# Altium PCB JacdacRgbLed1Ec30 77.PcbDoc
Units mm, origin at the board's own origin, x right, y up, seen from the top; angles counter-clockwise.
Board outline 25 x 28 mm, 2 copper layers (Top Layer, Bottom Layer), stack 1.525 mm thick; 31 components, 28 nets, 136 pads, 42 vias.
Unrouted connection lines stored in the file: 10.
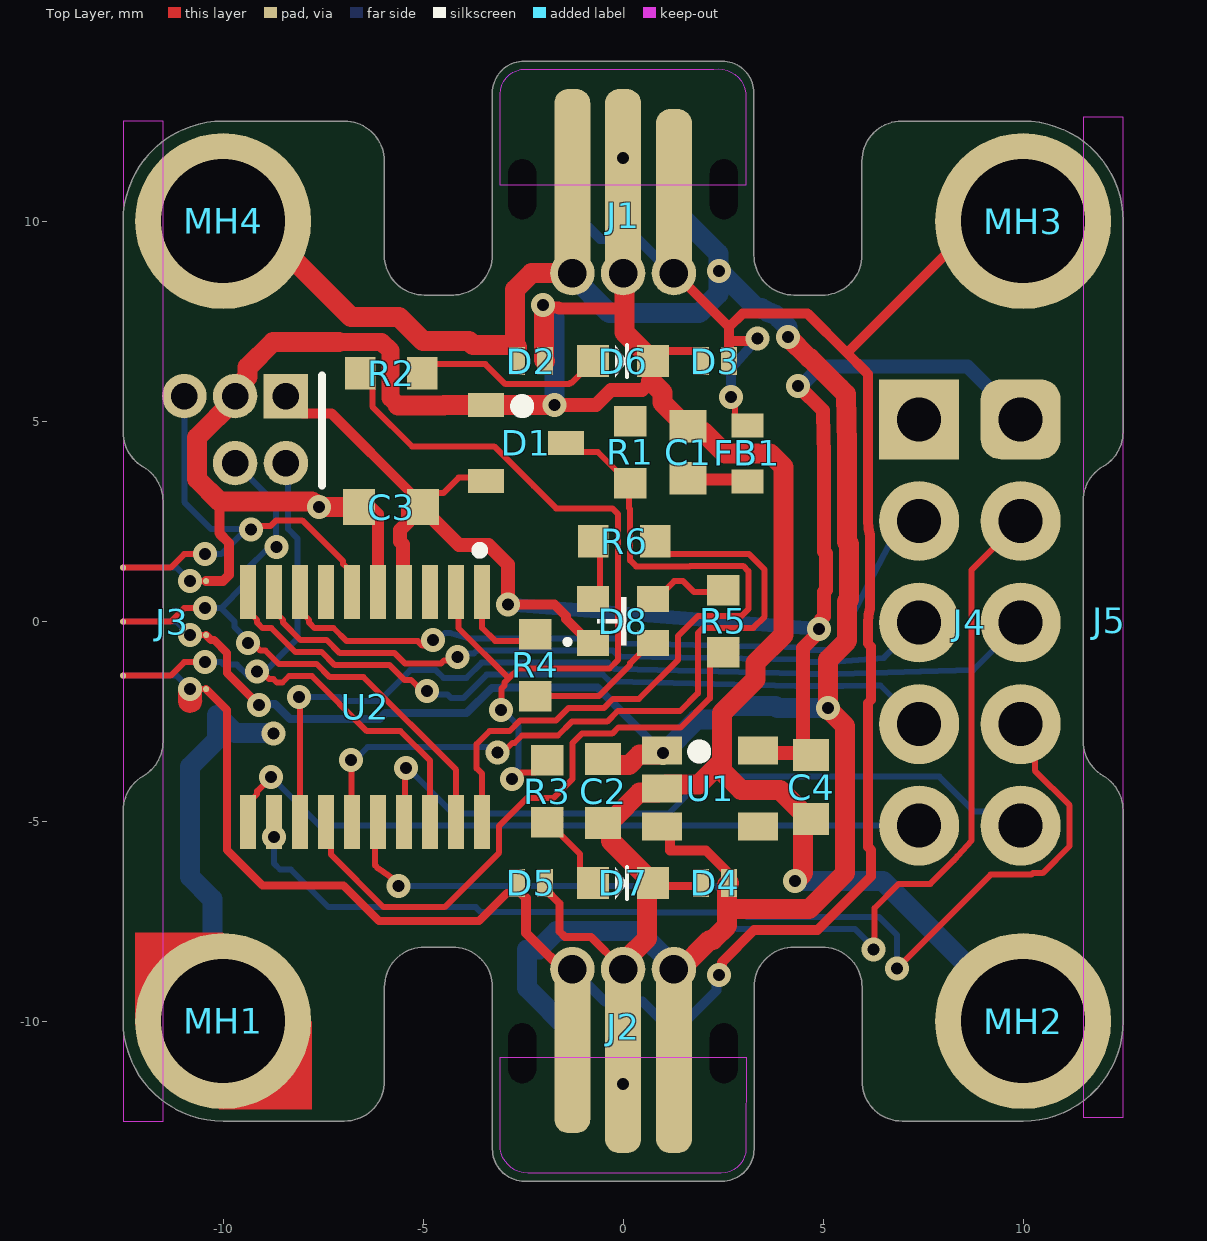
[diagram p0: Top Layer view]
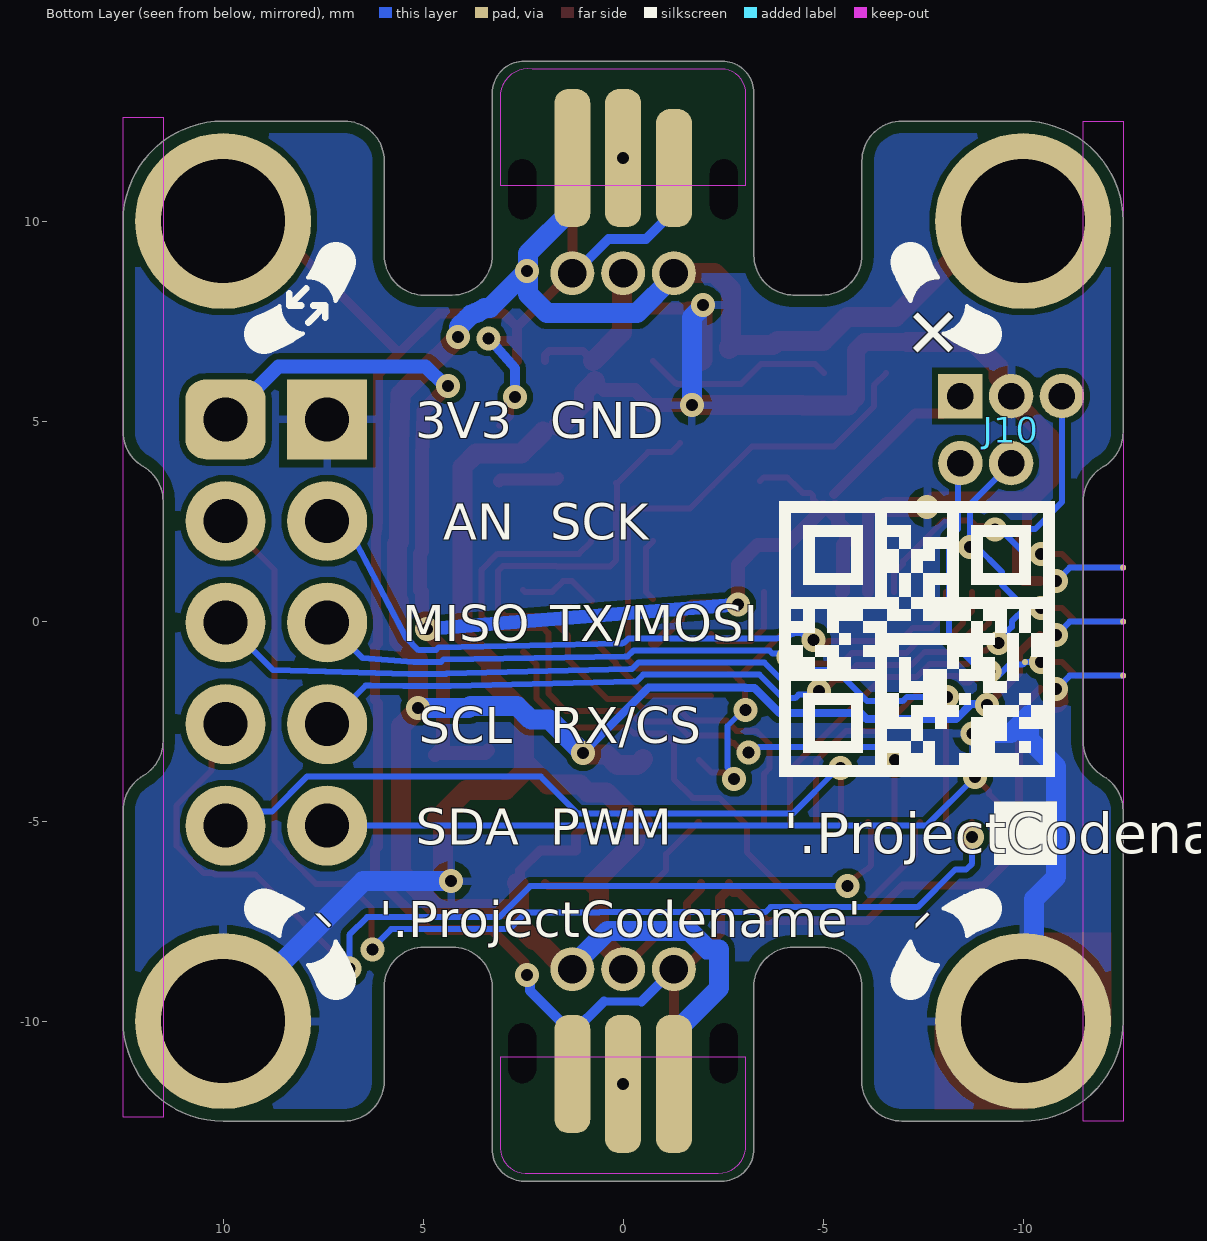
[diagram p1: Bottom Layer view, seen from below]

## Layer stack, top to bottom
Top Solder: solder mask 0.0102, Solder Resist, Dk 3.5
Top Layer: signal copper 0.0356
Dielectric 1: core 1.454, FR-4, Dk 4.2
Bottom Layer: signal copper 0.0356
Bottom Solder: solder mask 0.0102, Solder Resist, Dk 3.5

## Board outline
-12.5,-10 ccw(c-10,-10) -10,-12.5 -6.966,-12.5 ccw(c-6.966,-11.5) -5.966,-11.5 -5.966,-9.148 cw(c-4.966,-9.148) -4.966,-8.148 -4.266,-8.15 cw(c-4.266,-9.15) -3.266,-9.15 -3.266,-13.2 ccw(c-2.466,-13.2) -2.466,-14 2.474,-14 ccw(c2.474,-13.2) 3.274,-13.2 3.274,-9.148 cw(c4.273,-9.149) 4.274,-8.15 4.244,-8.15 4.974,-8.15 cw(c4.975,-9.149) 5.974,-9.148 5.974,-11.5 ccw(c6.974,-11.5) 6.974,-12.5 10,-12.5 ccw(c10,-10) 12.5,-10 12.5,-4.732 ccw(c11.5,-4.732) 12,-3.866 cw(c12.5,-3) 11.5,-3 11.5,3 cw(c12.5,3) 12,3.866 ccw(c11.5,4.732) 12.5,4.732 12.5,10 ccw(c10,10) 10,12.5 6.97,12.5 ccw(c6.97,11.5) 5.97,11.5 5.97,9.148 cw(c4.97,9.148) 4.97,8.148 4.27,8.15 cw(c4.27,9.15) 3.27,9.15 3.27,13.2 ccw(c2.47,13.2) 2.47,14 -2.47,14 ccw(c-2.47,13.2) -3.27,13.2 -3.27,9.148 cw(c-4.269,9.149) -4.27,8.15 -4.24,8.15 -4.97,8.15 cw(c-4.971,9.149) -5.97,9.148 -5.97,11.5 ccw(c-6.97,11.5) -6.97,12.5 -10,12.5 ccw(c-10,10) -12.5,10 -12.5,4.723 ccw(c-11.5,4.723) -12,3.857 cw(c-12.5,2.992) -11.5,2.992 -11.5,-3.008 cw(c-12.5,-3.008) -12,-3.874 ccw(c-11.5,-4.74) -12.5,-4.74

## Design rules (kind name [scope] priority, off if disabled: settings)
AssemblyTestPointUsage [All] p1: valid=2
BoardOutlineClearance [not (HasFootprint('MOUSEBITE_CONNECTOR_3X2') or HasFootprint('MOUSEBITE_NOCONNECTOR_3'))] p1: gap=0.3 ignorepadtopadclearanceinfootprint=FALSE except(0: Arc-SplitContinuation Track-SplitContinuation SMDPad-SplitContinuation THPad-SplitContinuation Via-SplitContinuation Fill-SplitContinuation Poly-SplitContinuation Text-OutlineEdge Text-CavityEdge Text-CutoutEdge Text-SplitBarrior Text-SplitContinuation; 0.15: Region-OutlineEdge Region-CavityEdge Region-CutoutEdge Region-SplitBarrior Region-SplitContinuation)
Clearance [not (IsPad and HasFootprint('MOUSEBITE_CONNECTOR_3X2'))] p1: gap=0.15 ignorepadtopadclearanceinfootprint=FALSE except(0.254: Arc-Hole Track-Hole SMDPad-Hole THPad-Hole Via-Hole Fill-Hole Poly-Hole Region-Hole Text-Hole)
ComponentClearance [All] p1: gap=0.01 collisioncheckmode=3 verticalgap=0.2 showdistances=FALSE
DiffPairsRouting [All] p1: maxlimit=2 minlimit=0.15 mostfreqgap=0.15 toplayer_minwidth=0.15 toplayer_maxwidth=2 toplayer_prefwidth=0.15 bottomlayer_minwidth=0.15 bottomlayer_maxwidth=2 bottomlayer_prefwidth=0.15 substack1={CB9D278B-8BF5-444A-AAF4-837A2A9DF42D} toplayer_{cb9d278b-8bf5-444a-aaf4-837a2a9df42d}_minwidth=0.381 toplayer_{cb9d278b-8bf5-444a-aaf4-837a2a9df42d}_maxwidth=0.381 toplayer_{cb9d278b-8bf5-444a-aaf4-837a2a9df42d}_prefwidth=0.381 bottomlayer_{cb9d278b-8bf5-444a-aaf4-837a2a9df42d}_minwidth=0.381 bottomlayer_{cb9d278b-8bf5-444a-aaf4-837a2a9df42d}_maxwidth=0.381 bottomlayer_{cb9d278b-8bf5-444a-aaf4-837a2a9df42d}_prefwidth=0.381 substack2={826B8647-A721-4255-895A-19F9591B9CD1} toplayer_{826b8647-a721-4255-895a-19f9591b9cd1}_minwidth=0.381 toplayer_{826b8647-a721-4255-895a-19f9591b9cd1}_maxwidth=0.381 toplayer_{826b8647-a721-4255-895a-19f9591b9cd1}_prefwidth=0.381 bottomlayer_{826b8647-a721-4255-895a-19f9591b9cd1}_minwidth=0.381 bottomlayer_{826b8647-a721-4255-895a-19f9591b9cd1}_maxwidth=0.381 bottomlayer_{826b8647-a721-4255-895a-19f9591b9cd1}_prefwidth=0.381 substack3={E64FCAF4-1BC8-437D-B1E0-0E5F2DC0F59E} toplayer_{e64fcaf4-1bc8-437d-b1e0-0e5f2dc0f59e}_minwidth=0.381 toplayer_{e64fcaf4-1bc8-437d-b1e0-0e5f2dc0f59e}_maxwidth=0.381 toplayer_{e64fcaf4-1bc8-437d-b1e0-0e5f2dc0f59e}_prefwidth=0.381 bottomlayer_{e64fcaf4-1bc8-437d-b1e0-0e5f2dc0f59e}_minwidth=0.381 bottomlayer_{e64fcaf4-1bc8-437d-b1e0-0e5f2dc0f59e}_maxwidth=0.381 bottomlayer_{e64fcaf4-1bc8-437d-b1e0-0e5f2dc0f59e}_prefwidth=0.381 substack4={E61CE66C-507C-4E1E-8E83-C905434AFC1C} toplayer_{e61ce66c-507c-4e1e-8e83-c905434afc1c}_minwidth=0.381 toplayer_{e61ce66c-507c-4e1e-8e83-c905434afc1c}_maxwidth=0.381 toplayer_{e61ce66c-507c-4e1e-8e83-c905434afc1c}_prefwidth=0.381 bottomlayer_{e61ce66c-507c-4e1e-8e83-c905434afc1c}_minwidth=0.381 bottomlayer_{e61ce66c-507c-4e1e-8e83-c905434afc1c}_maxwidth=0.381 bottomlayer_{e61ce66c-507c-4e1e-8e83-c905434afc1c}_prefwidth=0.381 maxuncoupledlength=25
FabricationTestPointUsage [All] p1: valid=2 allowmultiple=FALSE
HoleSize [All] p1: absolutevalues=TRUE maxlimit=5 minlimit=0.3 maxpercent=80.000 minpercent=20.000
HoleToHoleClearance [IsPad and not (HasFootprint('MOUSEBITE_CONNECTOR_3X2') or HasFootprint('MOUSEBITE_NOCONNECTOR_3')) vs IsPad and not  (HasFootprint('MOUSEBITE_CONNECTOR_3X2') or HasFootprint('MOUSEBITE_NOCONNECTOR_3'))] p1: gap=0.5 allowstackedmicrovias=TRUE
MinimumAnnularRing [All] p1: minimumring=0.15
MinimumSolderMaskSliver [All] p1: minsoldermaskwidth=0.005
PlaneClearance [All] p1: clearance=0.3
PlaneConnect [All] p1: planeconnectstyle=Relief reliefexpansion=0.5 reliefentries=4 reliefconductorwidth=0.2 reliefairgap=0.3
PolygonConnect "PolygonConnect GND" [isVIA] p1: connectstyle=Relief reliefconductorwidth=0.2 reliefentries=4 polygonreliefangle="90 Angle" airgapwidth=0.2
PolygonConnect [All] p2: connectstyle=Relief reliefconductorwidth=0.2 reliefentries=4 polygonreliefangle="90 Angle" airgapwidth=0.2
RoutingVias [All] p1: holewidth=0.3 width=0.6 viastyle="Through Hole" minholewidth=0.3 minwidth=0.6 maxholewidth=0.3 maxwidth=0.8
SilkToSilkClearance [All] p1: silktosilkclearance=0.001
SilkToSolderMaskClearance [IsPad] p1: minsilkscreentomaskgap=0.05 clearancetoexposedcopper=TRUE
SolderMaskExpansion [All] p1: expansion=0.075 istentingtop=FALSE
UnRoutedNet [All] p1: checkbadconnections=TRUE
Width [All] p1: maxlimit=2 minlimit=0.15 preferedwidth=0.15 substack1={CB9D278B-8BF5-444A-AAF4-837A2A9DF42D} substack2={826B8647-A721-4255-895A-19F9591B9CD1} substack3={E64FCAF4-1BC8-437D-B1E0-0E5F2DC0F59E} substack4={E61CE66C-507C-4E1E-8E83-C905434AFC1C} minimp=50.000000 maximp=50.000000 favimp=50.000000
18 further rules are at their usual default settings.

## Components (designator, comment, footprint, x,y, rotation, side; value= is the part's Value field where it differs from the comment)
C1 "33pF" CC0603 1.623,4.225 r270 top
C2 "1uF 16V" "C0603 - without outline" -0.5,-4.25 r90 top
C3 "1uF 16V" "C0603 - without outline" -5.8,2.85 r0 top
C4 "1uF 16V" "C0603 - without outline" 4.7,-4.15 r90 top
D1 "BAT54S" "NXP-BAT54S-TO-236AB - without outline" -2.423,4.45 r0 top
D2 "RCLAMP0521P-N" "TVS 0402 - L" -2.3,6.5 r0 top
D3 "RCLAMP0521P-N" "TVS 0402 - L" 2.3,6.5 r180 top
D4 "RCLAMP0521P-N" "TVS 0402 - L" 2.3,-6.55 r180 top
D5 "RCLAMP0521P-N" "TVS 0402 - L" -2.3,-6.55 r0 top
D6 "'''" "0603 Orange" 0,6.5 r180 top
D7 "'''" "0603 Orange" 0,-6.55 r180 top
D8 "TZ-P4-1615RGBTCA1-0.55T" TZ-P4-1615RGBTCA1-0.55T 0,0 r0 top
FB1 "TDK MPZ1608S102ATA00" "TDK MPZ1608 0.8mm - without outline" 3.107,4.194 r270 top
J1 "3 pin JACDAC edge connector" JACDAC_EDGE_CONNECTOR_NO_TRACES#1 0,8.15 r0 top
J2 "3 pin JACDAC edge connector" JACDAC_EDGE_CONNECTOR_NO_TRACES#2 0,-8.15 r180 top
J3 "3x2 way 'mouse bite' connector for Jacdac and SWD" MOUSEBITE_CONNECTOR_3x2 -10.825,-1.7 r180 top
J4 "0.1\"" "Generic 2x5 2.54mm header" 8.67,1.235 r90 top
J5 "3 way 'mouse bite' connector" MOUSEBITE_NOCONNECTOR_3 10.825,1.7 r0 top
J10 "Hack Connect Mini 1.27 mm pitch 2-row" HACK_CONNECT_MINI_5_X_1_27 -8.43,5.626 r270 bottom
MH1 "MH_6.5MMK_4.5MMC_3.0MMD_PTH" MH_6.5MMK_4.5MMC_3.0MMD_PTH#1 -10,-10 r0 top
MH2 "MH_6.5MMK_4.5MMC_3.0MMD_PTH" MH_6.5MMK_4.5MMC_3.0MMD_PTH#2 10,-10 r0 top
MH3 "MH_6.5MMK_4.5MMC_3.0MMD_PTH" MH_6.5MMK_4.5MMC_3.0MMD_PTH#2 10,10 r0 top
MH4 "MH_6.5MMK_4.5MMC_3.0MMD_PTH" MH_6.5MMK_4.5MMC_3.0MMD_PTH#2 -10,10 r0 top
R1 "220R" RC0603 0.172,4.225 r270 top
R2 "150R" RC0603 -5.8,6.2 r0 top
R3 "150R" RC0603 -1.9,-4.25 r270 top
R4 "30R" RC0603 -2.2,-1.1 r90 top
R5 "30R" RC0603 2.5,0 r270 top
R6 "150R" RC0603 0.025,2 r0 top
U1 "" MICRONE-SOT23-5 2.178,-4.185 r0 top
U2 "STM32G0 (see BOM)" 20-TSSOP -6.45,-2.146 r270 top

## Footprints (in the part's own frame and the unit in brackets; to place one, negate y for a bottom-side part, rotate by r counter-clockwise, add the part's x,y. Pads: shape width x height; smd on the part's side, far side on the other; paste and mask are expansions set on the pad)
20-TSSOP [mm] "0.173\", 4.40mm Width"
  rect 1.35x0.4 smd: 1(-2.875,2.925) 2(-2.875,2.275) 3(-2.875,1.625) 4(-2.875,0.975) 5(-2.875,0.325) 6(-2.875,-0.325) 7(-2.875,-0.975) 8(-2.875,-1.625) 9(-2.875,-2.275) 10(-2.875,-2.925) 11(2.875,-2.925) 12(2.875,-2.275) 13(2.875,-1.625) 14(2.875,-0.975) 15(2.875,-0.325) 16(2.875,0.325) 17(2.875,0.975) 18(2.875,1.625) 19(2.875,2.275) 20(2.875,2.925)
  silkscreen extent -4,2.78 -3.83,2.95, body extent -3.3,-3.3 3.3,3.3, height 1.2
"0603 Orange" [mm]
  rect 0.8x0.8 smd paste-0.05: 1(-0.75,0) 2(0.75,0)
  silkscreen extent -0.1,-0.4 0.2,0.4, body extent -0.79,-0.4 0.81,0.4, height 0.4
"C0603 - without outline" [mm]
  rect 0.8x0.9 smd: 1(-0.8,0) 2(0.8,0)
  body extent -0.9,-0.5 0.9,0.5, height 0.9
CC0603 [mil]
  rect 32x36 smd: 1(-25.5,0) 2(25.5,0)
  body extent -33,-18 34,18, height 36
"Generic 2x5 2.54mm header" [mm] "5x2 2.54mm 0.1\" header vertical th"
  rect 2x2 hole 1.1: 1(3.81,1.27)
  rrect50% 2x2 hole 1.1: 2(3.81,-1.27)
  round 2 hole 1.1: 3(1.27,1.27) 4(1.27,-1.27) 5(-1.27,1.27) 6(-1.27,-1.27) 7(-3.81,1.27) 8(-3.81,-1.27) 9(-6.35,1.27) 10(-6.35,-1.27)
  body extent -7.62,-2.54 5.08,2.54, height 8.65
HACK_CONNECT_MINI_5_X_1_27 [mm] "5 pins, 1.27mm x 1.676mm pitch"
  rect 1.11x1.11 hole 0.66: 1(0,0)
  round 1.11 hole 0.66: 2(1.676,0) 3(0,1.27) 4(1.676,1.27) 5(0,2.54)
JACDAC_EDGE_CONNECTOR_NO_TRACES#1 [mm] "JacDac 3 pin connector with no traces"
  rrect78% 0.9x2.95 smd far side paste-1 mask+0: 1(-1.27,3.175)
  round 1.11 / inner round 0.71 / far side round 1.1 hole 0.71 paste-0.254 mask+0: 1(1.27,0.55) 2(0,0.55) 3(-1.27,0.55)
  rrect78% 0.9x4.3 smd paste-1 mask+0: 1(1.27,2.5)
  rrect78% 0.9x4.8 smd paste-1 mask+0: 2(0,2.75) 3(-1.27,2.75)
  rrect78% 0.9x3.45 smd far side paste-1 mask+0: 2(0,3.425) 3(1.27,3.425)
  round 0 hole 0.7 slot 1.5 at 90 deg unplated: ""(-2.52,2.65) ""(2.52,2.65)
  Top Layer keep-out region: -3.075,2.75 -3.07,5.033 -2.987,5.341 -2.761,5.567 -2.453,5.65 -2.453,5.65 2.27,5.65 2.545,5.635 2.794,5.516 2.978,5.31 3.07,5.05 3.07,5.05 3.07,2.75
  Bottom Layer keep-out region: -3.07,2.75 -3.07,5.033 -3.023,5.269 -2.889,5.469 -2.689,5.603 -2.453,5.65 -2.453,5.65 2.27,5.65 2.545,5.635 2.794,5.516 2.978,5.31 3.07,5.05 3.07,5.05 3.07,2.75
JACDAC_EDGE_CONNECTOR_NO_TRACES#2 [mm] "Jacdac 3 pin connector with no traces"
  rrect78% 0.9x2.95 smd far side paste-1 mask+0: 1(-1.27,3.175)
  rrect78% 0.9x4.3 smd paste-1 mask+0: 1(1.27,2.5)
  round 1.11 / inner round 0.71 / far side round 1.1 hole 0.71 paste-0.254 mask+0: 1(1.27,0.55) 2(0,0.55) 3(-1.27,0.55)
  rrect78% 0.9x3.45 smd far side paste-1 mask+0: 2(0,3.425) 3(1.27,3.425)
  rrect78% 0.9x4.8 smd paste-1 mask+0: 2(0,2.75) 3(-1.27,2.75)
  round 0 hole 0.7 slot 1.5 at 90 deg unplated: ""(-2.52,2.65) ""(2.52,2.65)
  Top Layer keep-out region: -3.075,2.75 -3.07,5.033 -2.987,5.341 -2.761,5.567 -2.453,5.65 -2.453,5.65 2.27,5.65 2.545,5.635 2.794,5.516 2.978,5.31 3.07,5.05 3.07,5.05 3.07,2.75
  Bottom Layer lines w0.2: -1.126,0.85 -1.27,0.85
  Bottom Layer keep-out region: -3.07,2.75 -3.07,5.033 -3.023,5.269 -2.889,5.469 -2.689,5.603 -2.453,5.65 -2.453,5.65 2.27,5.65 2.545,5.635 2.794,5.516 2.978,5.31 3.07,5.05 3.07,5.05 3.07,2.75
MH_6.5MMK_4.5MMC_3.0MMD_PTH#1 [mm] "Jacdac mounting hole 6.5mm clearance, 4.5 annualar ring and 3.0mm PTH"
  round 4.4 / inner round 5 / far side round 4.4 hole 3.1 mask+0.05: 1(0,0)
MH_6.5MMK_4.5MMC_3.0MMD_PTH#2 [mm] "Jacdac mounting hole 6.5mm clearance, 4.5 annualar ring and 3.0mm PTH"
  round 4.4 hole 3.1 mask+0.05: 1(0,0)
MICRONE-SOT23-5 [mm]
  rect 1x0.7 smd: 1(-1.2,0.95) 2(-1.2,0) 3(-1.2,-0.95) 4(1.2,-0.95) 5(1.2,0.95)
  silkscreen extent -0.32,0.88 -0.23,0.97, body extent -1.32,-1.5 1.32,1.5, height 1.11
MOUSEBITE_CONNECTOR_3x2 [mm]
  round 0.15 smd mask-1: 1(-0.4,0) 2(1.675,-0.337) 3(-0.4,-1.35) 4(1.675,-1.686) 5(-0.4,-2.7) 6(1.675,-3.037)
  round 0.15 smd far side mask-1: 1(1.675,-0.337) 2(-0.775,-0.675) 3(1.675,-1.687) 4(-0.775,-2.025) 5(1.675,-3.037) 6(-0.775,-3.375)
  round 0.6 smd far side mask-1: 2(-0.375,-0.675) 4(-0.375,-2.025) 6(-0.375,-3.375)
  round 0.6 smd mask-1: 3(0,-1.35) 5(0,-2.7)
  round 0 hole 0.6 unplated: 7(0.975,0.338) 7(0.975,-1.012) 7(0.975,-2.362) 7(0.975,-3.712)
  round 0 hole 2 unplated: 7(1.675,1.039) 7(1.675,-4.413)
  Top Layer region: -0.3,0.3 -0.3,0 0.3,0 0.3,0.3
  Top Layer region: -0.3,0.29 -0.27,0.421 -0.185,0.526 -0.063,0.583 0.071,0.581 0.192,0.521 0.273,0.414 0.3,0.282 0.3,0.282
  Top Layer lines w0.15: 1.675,-0.337 0.488,-0.337 0.15,-0.675 -0.375,-0.675 ; 1.675,-1.687 0.488,-1.687 0.15,-2.025 -0.375,-2.025 ; 1.675,-3.037 0.488,-3.037 0.15,-3.375 -0.375,-3.375 ; 0,0 -0.4,0 ; 0,-1.35 -0.4,-1.35 ; 0,-2.7 -0.4,-2.7
  Bottom Layer lines w0.15: 1.675,-0.337 0.337,-0.337 0,0 ; 1.675,-1.687 0.337,-1.687 0,-1.35 ; 1.675,-3.037 0.337,-3.037 0,-2.7 ; -0.375,-0.675 -0.775,-0.675 ; -0.375,-2.025 -0.775,-2.025 ; -0.375,-3.375 -0.775,-3.375
MOUSEBITE_NOCONNECTOR_3 [mm]
  round 0 hole 0.6 unplated: 7(0.975,-3.712) 7(0.975,-2.362) 7(0.975,-1.012) 7(0.975,0.338)
  round 0 hole 2 unplated: 7(1.675,-4.413) 7(1.675,1.039)
"NXP-BAT54S-TO-236AB - without outline" [mm] "SOT23, 3-Leads, Body 2.90x2.30mm, Pitch 0.95mm, IPC Medium Density"
  rect 0.9x0.6 smd: 1(-1,0.95) 2(-1,-0.95) 3(1,0)
  silkscreen extent -0.15,0.88 -0.05,0.97, body extent -1.32,-1.5 1.32,1.5, height 1.12
RC0603 [mil]
  rect 30x32 smd: 1(-30.5,0) 2(30.5,0)
  body extent -31,-16 32,16, height 28
"TDK MPZ1608 0.8mm - without outline" [mm]
  rect 0.6x0.8 smd: 1(-0.7,0) 2(0.7,0)
  body extent -0.8,-0.4 0.8,0.4, height 0.8
"TVS 0402 - L" [mm] "TVS 0402 RoHS"
  rect 0.4x0.7 smd paste-0.038 mask+0.05: 1(-0.35,0) 2(0.35,0)
  body extent -0.5,-0.3 0.5,0.3, height 0.5
TZ-P4-1615RGBTCA1-0.55T [mm] "1615 Light Emitting Diodes (LED) RoHS"
  rect 0.8x0.65 smd mask+0.05: 1(-0.75,-0.55) 2(-0.75,0.55) 3(0.75,0.55) 4(0.75,-0.55)
  silkscreen extent -1.44,-0.6 0.07,0.6, body extent -0.8,-0.75 0.8,0.75, height 0.55

## Part data
C1: library part CC0603JRNPO9BN330, "Cap 33PF 50V 0603 SMD 5% NP0", Case Code (Imperial)=0603, Case Code (Metric)=1608, Dielectric=C0G, Dielectric Material=Ceramic, Insulation Resistance=100GR, Manufacturer 1=Yageo, Max Operating Temperature=125°C, Min Operating Temperature=-55°C, Package Quantity=1, Supplier Part Number 1=311-1064-2-ND, Temperature Coefficient=30ppm/°C, Tolerance=5%, Voltage=50V, Capacitance=33pF, Case/Package=0603, Category="Ceramic Capacitors", ComponentLink1Description=https://datasheet.ciiva.com/11786/0900766b8079c870-11786082.pdf?src-supplier=RSComponents, ComponentLink1URL=https://datasheet.ciiva.com/11786/0900766b8079c870-11786082.pdf?src-supplier=RSComponents, ComponentLink2Description="Online part number coding", ComponentLink2URL=https://datasheet.ciiva.com/144/mlccorderingcode-144075.pdf?src-supplier=Digi-Key, ComponentLink3Description="Online datasheet", ComponentLink3URL=https://datasheet.ciiva.com/17434/upy-gphc-x7r-6-3v-to-50v-8-17434263.pdf, ComponentLink4Description="Online datasheet", ComponentLink4URL=https://datasheet.ciiva.com/26829/getdatasheetpartid-403577-26829431.pdf, ComponentLink5Description=https://datasheet.ciiva.com/26862/getdatasheetpartid-403532-26862767.pdf?src-supplier=Verical, ComponentLink5URL=https://datasheet.ciiva.com/26862/getdatasheetpartid-403532-26862767.pdf?src-supplier=Verical, ComponentLink6Description=https://datasheet.ciiva.com/8033/1443161-8033735.pdf?src-supplier=Element14, ComponentLink6URL=https://datasheet.ciiva.com/8033/1443161-8033735.pdf?src-supplier=Element14, ComponentLink7Description=https://datasheet.ciiva.com/7978/1443161-7978142.pdf?src-supplier=Element14, ComponentLink7URL=https://datasheet.ciiva.com/7978/1443161-7978142.pdf?src-supplier=Element14, ComponentLink8Description=https://datasheet.ciiva.com/46430/1835847-46430155.pdf?src-supplier=Element14, ComponentLink8URL=https://datasheet.ciiva.com/46430/1835847-46430155.pdf?src-supplier=Element14, ComponentLink9Description=https://datasheet.ciiva.com/144/mlccorderingcode-144644.pdf?src-supplier=Digi-Key, ComponentLink9URL=https://datasheet.ciiva.com/144/mlccorderingcode-144644.pdf?src-supplier=Digi-Key, ComponentLink10Description=https://datasheet.ciiva.com/144/mlccorderingcode-144643.pdf?src-supplier=Digi-Key, ComponentLink10URL=https://datasheet.ciiva.com/144/mlccorderingcode-144643.pdf?src-supplier=Digi-Key, ComponentLink11Description=https://datasheet.ciiva.com/144/mlccorderingcode-144645.pdf?src-supplier=Digi-Key, ComponentLink11URL=https://datasheet.ciiva.com/144/mlccorderingcode-144645.pdf?src-supplier=Digi-Key, ComponentLink12Description=https://datasheet.ciiva.com/5426/upy-gp-np0-16v-to-50v-8-5426614.pdf?src-supplier=Mouser, ComponentLink12URL=https://datasheet.ciiva.com/5426/upy-gp-np0-16v-to-50v-8-5426614.pdf?src-supplier=Mouser, ComponentLink13Description=https://datasheet.ciiva.com/8033/1372269-8033734.pdf?src-supplier=Element14, ComponentLink13URL=https://datasheet.ciiva.com/8033/1372269-8033734.pdf?src-supplier=Element14, ComponentLink14Description=https://datasheet.ciiva.com/11464/upy-gp-np0-16v-to-50v-8-11464730.pdf?src-supplier=Avnet, ComponentLink14URL=https://datasheet.ciiva.com/11464/upy-gp-np0-16v-to-50v-8-11464730.pdf?src-supplier=Avnet, Depth=0.8mm, Height=0.8mm, Lead Free="Lead Free", Length=1.6mm, Manufacturer Part Number 1=CC0603JRNPO9BN330, Mount="Surface Mount", Number of Pins=2, Packaging="Tape and Reel", Pricing 1="4000=0.00888, 8000=0.00811 (USD)", Radiation Hardening=No, REACH SVHC="No SVHC", Resistor Type=Ceramic, RoHS=Yes, RoHS Compliant=Yes, Series=CC, Stock 1=422723, Supplier 1=Digi-Key, Supplier 2=Farnell, Supplier 3=RSComponents, Supplier 4=Mouser, Supplier 5=LCSC, Supplier Part Number 2=2408499, Supplier Part Number 3=2006492, Supplier Part Number 4=603-C0603JRNPO9BN330, Supplier Part Number 5=C107047, Termination=SMD/SMT, Thickness=0.035inch, Voltage Rating=50V, Voltage Rating (DC)=50V, Width=0.031inch
C2 C3 C4: library part CL10A105KO8NNNC, "SMD Multilayer Ceramic Capacitor, 1 µF, 16 V, 0603 [1608 Metric], ± 10%, X5R, CL Series", Capacitance=1uF, Case Code (Imperial)=0603, Case Code (Metric)=1608, Dielectric=X5R, Manufacturer 1=Samsung, Max Operating Temperature=85°C, Min Operating Temperature=-55°C, Package Quantity=1, Supplier Part Number 1=1276-1034-1-ND, Tolerance=10%, Voltage=16V, Case/Package=0603, Category="Ceramic Capacitors", ComponentLink1Description="Online datasheet", ComponentLink1URL=https://datasheet.lcsc.com/lcsc/1811021622_Samsung-Electro-Mechanics-CL10A105KO8NNNC_C1592.pdfq, Construction=Flat, Contact Plating=Tin, Depth=0.8mm, Height=0.8mm, Lead Free="Lead Free", Length=1.6mm, Manufacturer Part Number 1=CL10A105KO8NNNC, Material=Ceramic, Mount="Surface Mount", Packaging="Tape and Reel", Pricing 1="1=0.10000, 10=0.03600, 50=0.01960, 100=0.01600, 500=0.01144, 1000=0.00898 (USD)", Radiation Hardening=No, RoHS=Yes, RoHS Compliant=Yes, Series=CL, Stock 1=3575337, Supplier 1=Digi-Key, Supplier 2=Farnell, Supplier 3=RSComponents, Supplier 4=Mouser, Supplier 5=LCSC, Supplier Part Number 2=3013384, Supplier Part Number 3=7664780, Supplier Part Number 4=187-CL10A105KO8NNNC, Supplier Part Number 5=C1592, Thickness=0.035inch, Voltage Rating=16V, Voltage Rating (DC)=16V, Width=0.031inch
D1: "DIODE ARRAY SCHOTTKY 30V SOT23", Manufacturer=Nexperia, Supplier Part Number 1=1727-1868-1-ND, Category="Rectifier Diodes", ComponentLink1Description="NXP datasheet online", ComponentLink1URL=https://assets.nexperia.com/documents/data-sheet/BAT54_SER.pdf, Manufacturer Part Number=BAT54S, Pricing 1="1=0.13000, 10=0.11900, 100=0.05610, 500=0.03326, 1000=0.02185, 5000=0.02138 (USD)", RoHS=No, Stock 1=14011, Supplier 1=Digi-Key, Supplier 2=Mouser, Supplier 3=RSComponents, Supplier Part Number 2=771-BAT54S235, Supplier Part Number 3=1707990
D2 D4 D5: "Bidirectional 5V (Max) 6V 16V 3.5A (8/20us) 0402 TVS RoHS", Manufacturer 1="Born Semiconductor", Package=0402, Supplier Part Number 1=C316043, Checked By=?, ComponentLink1Description="Online datasheet", ComponentLink1URL=https://datasheet.lcsc.com/szlcsc/Bourne-Semicon-Shenzhen-RCLAMP0521P-N_C316043.pdf, Created By="D Gakure", Manufacturer Part Number 1=RCLAMP0521P-N, Supplier 1=LCSC
D3: "Bidirectional 5V (Max) 6V 16V 3.5A (8/20us) 0402 TVS RoHS", Manufacturer 1="Born Semiconductor", Manufacturer Part Number 1="RCLAMP0521 (see BOM)", Package=0402, Supplier Part Number 1=C316043, Checked By=?, ComponentLink1Description="Online datasheet", ComponentLink1URL=https://datasheet.lcsc.com/szlcsc/Bourne-Semicon-Shenzhen-RCLAMP0521P-N_C316043.pdf, Created By="D Gakure", Supplier 1=LCSC
D6 D7: library part 19-217/S2C-AQ1R1B/3T, "LED ORANGE DIFFUSED 0603 SMD", Case Code (Imperial)=0603, Color=Orange, Manufacturer 1="Everlight Elec", Supplier Part Number 1=C146215, Case/Package=0603, Colour=Orange, ComponentLink1Description="Online datasheet", ComponentLink1URL=https://datasheet.lcsc.com/lcsc/1912171731_Everlight-Elec-19-217-S2C-AQ1R1B-3T_C146215.pdf, Manufacturer Part Number 1=19-217/S2C-AQ1R1B/3T, Mount="Surface Mount", Supplier 1=LCSC
D8: "1615 Light Emitting Diodes (LED) RoHS", Manufacturer 1=TUOZHAN, Package=1615, Supplier Part Number 1=C779813, Category=Optoelectronics, Checked By=?, ComponentLink1Description="Online datasheet", ComponentLink1URL=https://datasheet.lcsc.com/szlcsc/2009041238_TUOZHAN-TZ-P4-1615RGBTCA1-0-55T_C779813.pdf, Created By="D. Gakure", Manufacturer Part Number 1=TZ-P4-1615RGBTCA1-0.55T, Packaging="Tape & Reel (TR)", RoHS="RoHS Compliant", Size / Dimension=1.6x1.5mm, Supplier 1=LCSC
FB1: "0603 1k@100MHz 0.8A chip", Case Code (Imperial)=0603, Case Code (Metric)=1608, Current Rating=800mA, DC Resistance (DCR)=300mR, Manufacturer=TDK, Manufacturer Part Number=MPZ1608S102ATA00, Package Quantity=4000, Supplier Part Number 1=445-8694-1-ND, Tolerance=25%, Case/Package=0603, ComponentLink2Description="datasheet online", ComponentLink2URL=https://www.mouser.co.uk/datasheet/2/400/eads_commercial_power_mpz1608_en-923650.pdf, ComponentLink3Description=datasheet, ComponentLink3URL="Y:\System\Altium\Libraries 2014\TDK\Datasheets\eads_commercial_power_mpz1608_en-923650.pdf", Core Material=Ferrite, Height=0.037inch, Impedance="1kR @ 100MHz", Length=0.063inch, Max DC Current=800mA, Mount="Surface Mount", Packaging="Tape and Reel", Pricing 1="1=0.1, 10=0.079, 25=0.0716, 50=0.0644, 100=0.0472, 250=0.03432, 500=0.03146, 1000=0.02717 (USD)", Stock 1=113542, Supplier 1=Digi-Key, Supplier 2=Mouser, Supplier Part Number 2=810-MPZ1608S102ATA00, Width=0.031inch
J1 J2: library part "Jacdac edge connector", "3 pin Jacdac edge connector 1.27mm pitch", Manufacturer Part Number=JACDAC_EDGE_CONNECTOR, Checked By=?, ComponentLink1Description="Yuliang JACDAC cable connector drawing online", ComponentLink1URL=https://github.com/microsoft/jacdac-mdk/blob/main/connector/JACDAC-Connector-by-Yuliang-2020-11-28.pdf, ComponentLink2Description="JACDAC PCB edge connector spec onlin", ComponentLink2URL=https://github.com/microsoft/jacdac-mdk/blob/main/connector/JACDAC_PCB_Edge_Connector_Drawing_JD-PEC-01_rev_01.pdf, Created By="D. Gakure", PCB Type="1.6mm FR4"
J3: library part MOUSEBITE_CONNECTOR_3x2_JDSWD
J4: library part "Header Multicomp 2213S-10G-whitesch", "2.54mm, 5x2 way, vertical, square pin, gold plate", Flammability Rating="UL94 V-0", Insulation Resistance=1GR, Manufacturer=Multicomp, Manufacturer Part Number=2213S-10G, Supplier Part Number 1=1593442, ComponentLink1Description="mulitcomp datasheet", ComponentLink1URL=http://www.farnell.com/datasheets/1697530.pdf, Contact Material="Copper Alloy", Contact Plating=Gold, Gender=Male, Height=0.47inch, Length=0.51inch, Mount="Through Hole", Number of Contacts=10, Number of Rows=2, Pricing 1="50=0.05290, 500=0.03900, 1500=0.03370, 2500=0.02750, 5000=0.02660, 10000=0.02550, 30000=0.02460, 50000=0.02360 (GBP)", REACH SVHC="No SVHC", RoHS=Yes, Stock 1=90304, Supplier 1=Farnell, Termination="Through Hole", Weight=0.11lb, Width=0.2inch
J5: library part MOUSEBITE_NOCONNECTOR_3
J10: library part HACK_CONNECT_MINI
MH1 MH2 MH3 MH4: "Mounting Hole 6.5mm keepout, 4.5mm annualar ring and 3.0mm Drill PTH"
R1: library part RC0603FR-07220RL, "Res Thick Film 0603 220 Ohm 1% 0.1W(1/10W) ±100ppm/°C Pad SMD T/R", Case Code (Imperial)=0603, Case Code (Metric)=1608, Manufacturer 1=Yageo, Max Operating Temperature=155°C, Max Power Dissipation=100mW, Min Operating Temperature=-55°C, Package Quantity=1, Resistance Tolerance=1%, Resistor Type="Thick Film", Supplier Part Number 1=311-220HRCT-ND, Temperature Coefficient=100ppm/°C, Voltage Rating=50V, Case/Package=0603, Category="Chip SMD Resistors", ComponentLink1Description="Online datasheet", ComponentLink1URL=https://datasheet.ciiva.com/11819/0900766b80f96399-11819290.pdf, Construction=Rectangular, Depth=0.8mm, Features="Moisture Resistant", Height=0.022inch, Lead Free="Lead Free", Length=1.6mm, Manufacturer Part Number 1=RC0603FR-07220RL, Military Standard=Not, Number of Pins=2, Number of Terminations=2, Packaging="Tape and Reel", Power Rating=100mW, Pricing 1="1=0.10000, 10=0.02400, 100=0.00970, 1000=0.00436, 2500=0.00378 (USD)", REACH SVHC="No SVHC", Resistance=220R, RoHS=Yes, RoHS Compliant=Yes, Series=RC, Size Code=0603, Stock 1=242327, Supplier 1=Digi-Key, Supplier 2=Farnell, Supplier 3=RSComponents, Supplier 4=Mouser, Supplier 5=LCSC, Supplier Part Number 2=9238409, Supplier Part Number 3=1995497, Supplier Part Number 4=603-RC0603FR-07220RL, Supplier Part Number 5=C107696, Termination=SMD/SMT, Tolerance=1%, Voltage Rating (DC)=50V, Width=0.031inch
R2 R3 R6: library part RC0603FR-07150RL, "Res General Purpose Thick Film 0603 150 Ohm 1% 1/10W ±100ppm/°C Molded SMD Paper T/R", Case Code (Imperial)=0603, Case Code (Metric)=1608, Manufacturer 1=Yageo, Max Operating Temperature=155°C, Max Power Dissipation=100mW, Min Operating Temperature=-55°C, Package Quantity=5000, Resistance Tolerance=1%, Resistor Type="Thick Film", Supplier Part Number 1=311-150HRCT-ND, Temperature Coefficient=100ppm/°C, Voltage Rating=50V, Case/Package=0603, Category="Chip SMD Resistors", ComponentLink1Description="Online datasheet", ComponentLink1URL=https://datasheet.ciiva.com/11819/0900766b80f96399-11819290.pdf, Construction=Rectangular, Depth=0.8mm, Features="Moisture Resistant", Height=0.45mm, Lead Free="Lead Free", Length=1.6mm, Manufacturer Part Number 1=RC0603FR-07150RL, Military Standard=Not, Number of Pins=2, Number of Terminations=2, Packaging="Tape and Reel", Power Rating=100mW, Pricing 1="1=0.10000, 10=0.02400, 100=0.00970, 1000=0.00436, 2500=0.00378 (USD)", REACH SVHC="No SVHC", Resistance=150R, RoHS=Yes, RoHS Compliant=Yes, Series=RC, Size Code=0603, Stock 1=2262542, Supplier 1=Digi-Key, Supplier 2=Farnell, Supplier 3=RSComponents, Supplier 4=Mouser, Supplier 5=LCSC, Supplier Part Number 2=9238387, Supplier Part Number 3=1995464, Supplier Part Number 4=603-RC0603FR-07150RL, Supplier Part Number 5=C114608, Termination=SMD/SMT, Tolerance=1%, Voltage Rating (DC)=50V, Width=0.8mm
R4 R5: library part RC0603FR-0730RL, "Res Thick Film 0603 30 Ohm 1% 0.1W(1/10W) ±100ppm/C Pad SMD T/R", Case Code (Imperial)=0603, Case Code (Metric)=1608, Manufacturer 1=Yageo, Max Operating Temperature=155°C, Max Power Dissipation=100mW, Min Operating Temperature=-55°C, Package Quantity=1, Resistor Type="Thick Film", Supplier Part Number 1=311-30.0HRCT-ND, Temperature Coefficient=100ppm/°C, Tolerance=1%, Voltage Rating=50V, Case/Package=0603, Category="Chip SMD Resistors", ComponentLink1Description="Online datasheet", ComponentLink1URL=https://datasheet.ciiva.com/11819/0900766b80f96399-11819290.pdf, ComponentLink2Description=https://datasheet.ciiva.com/11819/0900766b80c66297-11819676.pdf?src-supplier=RSComponents, ComponentLink2URL=https://datasheet.ciiva.com/11819/0900766b80c66297-11819676.pdf?src-supplier=RSComponents, ComponentLink3Description=https://datasheet.ciiva.com/2455/pyu-r-int-thick-7-2455119.pdf?src-supplier=Digi-Key, ComponentLink3URL=https://datasheet.ciiva.com/2455/pyu-r-int-thick-7-2455119.pdf?src-supplier=Digi-Key, ComponentLink4Description=https://datasheet.ciiva.com/2455/pyu-r-int-thick-7-2455120.pdf?src-supplier=Digi-Key, ComponentLink4URL=https://datasheet.ciiva.com/2455/pyu-r-int-thick-7-2455120.pdf?src-supplier=Digi-Key, ComponentLink5Description=https://datasheet.ciiva.com/2455/pyu-r-int-thick-7-2455121.pdf?src-supplier=Digi-Key, ComponentLink5URL=https://datasheet.ciiva.com/2455/pyu-r-int-thick-7-2455121.pdf?src-supplier=Digi-Key, Construction=Rectangular, Depth=0.8mm, Features="Moisture Resistant", Height=0.022inch, Lead Free="Lead Free", Length=0.063inch, Manufacturer Part Number 1=RC0603FR-0730RL, Military Standard=Not, Mount="Surface Mount", Number of Terminations=2, Packaging="Tape and Reel", Power Rating=100mW, Pricing 1="1=0.10000, 10=0.02400, 100=0.00970, 1000=0.00436, 2500=0.00378 (USD)", Resistance=30R, RoHS=Yes, RoHS Compliant=Yes, Series=RC, Size Code=0603, Stock 1=181493, Supplier 1=Digi-Key, Supplier 2=Farnell, Supplier 3=Mouser, Supplier 5=LCSC, Supplier Part Number 2=3495813, Supplier Part Number 3=603-RC0603FR-0730RL, Supplier Part Number 5=C128060, Technology="THICK FILM", Termination=SMD/SMT, Voltage Rating (DC)=50V, Width=0.031inch
U1: library part ME6211C33M5G-N, "6V 260mV @ 200mA(typ) - - Fixed 3.3V SOT-23-5 Linear Voltage Regulators (LDO) ROHS", Case/Package=SOT-23-5, Dropout Voltage=200mV, Manufacturer 1="MICRONE(Nanjing Micro One Elec)", Manufacturer Part Number 1="3.3V LDO (see BOM)", Max Input Voltage=6, Min Output Voltage=3.3V, Output Current=500mA, Supplier Part Number 1=C82942, Category="Voltage Regulators - Linear", Checked=?, ComponentLink3Description="On Semi datasheet online", ComponentLink3URL=https://datasheet.lcsc.com/lcsc/1811131510_MICRONE-Nanjing-Micro-One-Elec-ME6211C33M5G-N_C82942.pdf, Created=DG, Mount="Surface Mount", Number of Regulators=1, Output Configuration=Positive, Output Type=Fixed, Pricing 1="1=0.33000, 10=0.24900, 25=0.21760, 100=0.12440, 250=0.11664, 500=0.09330, 1000=0.07153 (USD)", Stock 1=32529, Supplier 1=LCSC
U2: library part STM32G031F6P6, "MCU 32-Bit STM32G031 ARM Cortex-M0+ RISC 32KB Flash 1.7V to 3.6V 20-Pin TSSOP Tube", Manufacturer=STMicroelectronics, Supplier Part Number 1=497-19774-ND, Category=Microcontrollers, Checked By=?, ComponentLink1Description="Online datasheet", ComponentLink1URL=https://www.st.com/resource/en/datasheet/stm32g031c6.pdf, Created By="D. Gakure", Manufacturer Part Number="STM32G0 (see BOM)", Pricing 1="1=2.39000, 10=2.14400, 25=2.02240, 100=1.72330, 250=1.61808, 500=1.41582, 1000=1.17985 (USD)", Pricing 2="1480=0.78200 (GBP)", RoHS=Yes, Stock 1=166, Supplier 1=Digi-Key, Supplier 2=Farnell, Supplier 3=RSComponents, Supplier 4=LCSC, Supplier Part Number 2=3246918, Supplier Part Number 3=1939834, Supplier Part Number 4=C529333

## Via types
v1: diameter 0.6, hole 0.3, Top Layer to Bottom Layer, tented both sides, 36 vias
v2: diameter 0.6, hole 0.3, Top Layer to Bottom Layer, 6 vias

## Nets (pads, with @x,y where several pads share a name; then routed paths per layer and width w, separated by ;. In a path a pad name is that pad's centre, name@x,y a point inside that pad or via, vN(x,y) a via of type N, cw(c..) or ccw(c..) an arc to the next point about the centre after c; other vN are vias at no path point)
3V3: C3.2 C4.2 D1.2 D8.1 J4.2 J10.1 U1.5 U2.4 | length 40.6
  Top Layer w0.15: C3.2@-5.375,2.475 -5.325,2.475 -4.975,2.825 -4.75,3.05 -4.75,3.131 -4.675,3.206 -4.488,3.206 -4.4,3.294 ; -4.4,3.295 -4.11,3.585 -3.508,3.585 D1.2
  Top Layer w0.25: J10.1 -8,5.196 -7.296,5.196 C3.2@-5.275,3.175 ; v1(-2.875,0.417) -1.717,0.417 -1.425,0.125 -1.425,0.05 -0.825,-0.55 D8.1
  Top Layer w0.35: U2.4 -5.5,0.754 -5.5,1.917 -5.575,1.992 -5.575,2.275 -5.375,2.475 -5.375,2.775 C3.2@-5.3,2.85 ; C3.2 -4.975,2.825 -4.975,2.775 -4.1,1.9 -3.361,1.9 -2.878,1.417 -2.878,0.42 v1(-2.875,0.417) ; U1.5 3.435,-3.292 4.642,-3.292 C4.2 4.5,-3.15 4.5,-0.668 4.9,-0.268 v1(4.9,-0.2) 4.948,-0.152 4.948,0.039 5.025,0.116 5.025,0.724 5.075,0.774 5.075,1.696 5.025,1.746 5.025,4.139 4.993,5.195 4.993,5.263 v1(4.378,5.878)
  Bottom Layer w0.35: v1(-2.875,0.417) v1(4.9,-0.2) ; v1(4.378,5.878) 4.446,5.878 4.938,6.37 8.615,6.37 J4.2
AN: J4.4 U2.12 | length 29.6
  Top Layer w0.15: v1(-8.725,-5.396) U2.12 ; v1(6.264,-8.209) 6.286,-8.187 6.286,-7.171 6.89,-6.568 7.617,-6.568 7.68,-6.568 8.266,-5.981 ccw(c7.4,-5.115) 8.362,-5.874 8.715,-5.487 8.715,1.28 J4.4
  Bottom Layer w0.15: v1(-8.725,-5.396) -8.725,-6.062 -8.577,-6.21 -8.305,-6.21 -7.365,-7.15 -3.684,-7.15 -3.559,-7.275 0.59,-7.275 0.603,-7.288 2.432,-7.288 2.844,-7.7 5.8,-7.7 6.264,-8.164 v1(6.264,-8.209)
GND: C1.1 C2.1 C3.1 C4.1 D1.1 D2.2 D3.2 D4.2 D5.2 D6.1 D7.1 J1.2 J2.2 J3.5 J4.1 J10.3 MH1.1 MH2.1 U1.2 U2.5 | length 80.6
  Top Layer w0.2: D5.2 -1.95,-6.7 -1.596,-7.054 -1.596,-7.754 -1.455,-7.895 -0.805,-7.895 J2.2@-0.057,-8.643 ; J2.2@0,-8.7 J2.2@0.174,-8.526 ; D7.1 0.825,-6.625 1.875,-6.625 D4.2 ; D6.1 1,6.75 1.85,6.75 1.95,6.65 D3.2
  Top Layer w0.25: J3.5@-10.425,1 -10.006,1 -9.85,1.156 -9.85,1.953 -10.096,2.198 -10.096,2.995
  Top Layer w0.3: C3.1@-6.3,2.85 -6.125,2.675 U2.5 ; v1(-2,7.9) -1.981,7.881 -1.943,7.843 -1.622,7.843 -1.598,7.819 0.031,7.819 ; 0.5,5.8 0.7,6
  Top Layer w0.35: v1(-1.717,5.4) -0.675,5.4 -0.3,5.775 0.475,5.775 0.5,5.8
  Top Layer w0.45: -7.099,6.98 -7.097,6.981 -6.038,6.981 -5.819,6.762 -5.819,5.584 -5.635,5.4
  Top Layer w0.5: -7.099,6.98 -8.752,6.98 -9.385,6.347 -9.385,6.106 -9.7,5.791 -9.7,5.546 -10.655,4.591 -10.655,3.554 -10.096,2.995 -9.304,2.995 -8.826,2.995 -7.772,2.995 -7.627,2.85 C3.1 ; -5.635,5.4 -5.629,5.394 -4.479,5.394 -4.472,5.4 D1.1 v1(-1.717,5.4) ; v1@-1.981,7.881 -1.981,6.531 D2.2 ; C2.1 -0.45,-5.05 -0.3,-5.2 -0.3,-5.5 D7.1 0.6,-6.7 0.6,-7.935 0.117,-8.418 0.117,-8.468 J2.2@0.174,-8.526 ; C2.1@-0.425,-5.025 -0.3,-4.9 -0.204,-4.9 0.412,-4.285 0.878,-4.285 1.078,-4.085 1.893,-4.085 2.478,-3.5 ; J1.2@-0.002,8.65 0.031,8.616 0.031,7.819 0.031,7.219 D6.1 ; 0.7,6 0.979,5.721 0.979,5.466 1.572,4.873 C1.1 ; C1.1@2,4.735 2.541,4.194 3.673,4.194 4.013,3.853 4.013,-0.342 3.306,-1.048 3.306,-1.465 2.478,-2.294 2.478,-3.5 ; v1(4.3,-6.5) 4.5,-6.3 4.5,-5.1 4.65,-4.95 3.917,-4.217 2.945,-4.217 2.478,-3.75 2.478,-3.5
  Bottom Layer w0.3: -10.15,-2.35 -10.125,-2.325
  Bottom Layer w0.5: MH1.1 -10.27,-9.73 -10.27,-6.95 -10.825,-6.395 -10.825,-3.635 -10.15,-2.96 -10.15,-2.35 -9.7,-2.8 -8.751,-2.8 v1(-8.74,-2.811) ; v1(-2,7.9) -2,7.873 -1.717,7.59 v1(-1.717,5.4) ; v1(4.3,-6.5) 6.5,-6.5 MH2.1
  other v1: 0,-11.575 -7.6,2.85 0,11.575
  other v2: -10.825,1
INT: U2.3
JD_DATA: D3.1 D5.1 FB1.1 J1.1 J2.1 J3.1 MH3.1 | length 63.2
  Top Layer w0.15: v1(2.7,5.6) 2.712,5.6 2.8,5.512 2.8,5.119 3.025,4.894 FB1.1
  Top Layer w0.2: J3.1@-10.425,-1.7 -9.9,-2.225 -9.9,-5.724 -9.012,-6.612 -6.988,-6.612 -6.1,-7.5 -3.6,-7.5 -2.9,-6.8 -2.75,-6.8 -2.65,-6.7 D5.1
  Top Layer w0.25: D5.1@-2.65,-6.7 -2.425,-6.925 -2.425,-7.795 -1.27,-8.95 J2.1@-1.27,-10.65 ; J1.1@1.27,10.65 1.27,8.7 1.3,8.7 2.575,7.425 ; v1(2.4,-8.85) 2.467,-8.783 2.467,-8.533 3.275,-7.725 4.862,-7.725 6.2,-6.387 6.2,-5.718 6.125,-5.643 6.125,-2.047 6.2,-1.972 6.2,-0.638 6.198,-0.636 6.125,-0.563 6.125,-0.038 cw(c7.4,-0.035) 6.175,0.319 6.175,2.151 cw(c7.4,2.505) 6.125,2.505 6.125,6.175 6.052,6.248 5.6,6.7 ; D3.1 2.65,6.93 2.725,7.005 3.296,7.005 v1(3.363,7.072) ; 2.65,7 2.65,7.35 2.986,7.686 4.614,7.686 5.6,6.7 ; MH3.1 8.9,10 5.6,6.7
  Bottom Layer w0.2: -0.459,-9.511 0.481,-9.511
  Bottom Layer w0.25: J1.1@-1.272,11.275 -1.272,10.25 -0.572,9.55 0.368,9.55 J1.1@1.268,8.65 ; J2.1@-1.27,-8.7 -0.459,-9.511 ; 0.481,-9.511 J2.1@1.27,-10.3 ; J2.1@1.27,-11.325 J2.1@1.27,-10.3 ; v1(2.4,-8.85) 2.333,-8.917 2.333,-9.237 J2.1@1.27,-10.3 ; v1(2.7,5.6) 2.7,6.321 v1(3.363,7.072)
  other v2: -10.825,-1.7
JD_DATA_MCU: D1.3 R1.2 U2.20 | length 18.5
  Top Layer w0.15: U2.20 -3.525,-3.813 -3.659,-3.679 -3.659,-3.071 -3.334,-2.747 -2.839,-2.747 -2.581,-2.489 -1.682,-2.489 -1.368,-2.175 -0.483,-2.175 -0.257,-1.948 0.395,-1.948 1.375,-0.968 1.375,-0.37 1.876,0.131 2.962,0.131 3.131,0.301 3.131,1.249 3,1.381 1.669,1.381 1.657,1.369 0.326,1.369 0.175,1.519 0.175,2.799 0.15,2.824 0.15,3.428 R1.2 0.147,3.45 -0.628,4.225 -1.198,4.225 D1.3
JD_PWR: C2.2 D2.1 D4.1 J1.3 J2.3 J3.3 MH4.1 U1.1 U1.3 | length 73.2
  Top Layer w0.2: J3.3@-10.425,-0.35 -10.3,-0.475 -10.222,-0.475 -9.9,-0.797 -9.9,-1.3 v1(-9.1,-2.1)
  Top Layer w0.25: U1.3 1.178,-5.335 1.178,-5.735 2.073,-5.735 2.575,-6.236 2.575,-6.475 D4.1
  Top Layer w0.5: MH4.1 -9.2,10 -6.806,7.606 -5.606,7.606 -5.006,7.006 -3.856,7.006 -3.75,6.9 -2.7,6.9 -2.65,6.85 -2.65,6.8 -2.7,6.85 -2.7,8.29 -2.29,8.7 -1.322,8.7 J1.3@-1.272,8.65 ; C2.2 -0.35,-3.6 0.146,-3.6 0.412,-3.335 0.878,-3.335 U1.1 ; J2.3@1.27,-8.7 1.435,-8.7 2.166,-7.969 2.246,-7.969 2.6,-7.616 2.6,-7.2 ; D4.1 2.6,-6.6 2.6,-7.2 ; v1(4.127,7.1) 4.649,6.578 4.668,6.578 5.422,5.824 5.568,5.678 5.6,4.377 5.6,1.984 5.65,1.934 5.65,0.536 5.6,0.486 5.6,-0.49 5.125,-0.965 v1@5.125,-2.124 ; v1(5.125,-2.171) 5.125,-2.198 5.55,-2.623 5.55,-6.294 4.644,-7.2 2.6,-7.2
  Bottom Layer w0.2: v1(-9.1,-2.1) -9.074,-2.074 -8.7,-2.074 -8.328,-2.446 -6.086,-2.446 -5.94,-2.3 -3.913,-2.3 -3.284,-1.672 -3.054,-1.672 -3.045,-1.663 -0.637,-1.663 v1(1,-3.3)
  Bottom Layer w0.25: -2.065,-8.329 -2.065,-8.187 -1.653,-7.775
  Bottom Layer w0.5: J1.3@-1.272,8.65 -1.272,8.629 -0.344,7.7 1.9,7.7 2.381,8.181 2.381,8.731 v1(2.4,8.75) 2.381,8.769 2.381,9.189 J1.3@1.268,10.302 ; J2.3@-1.27,-11.575 -1.27,-10.3 -2.4,-9.17 -2.4,-8.213 -2.126,-8.213 -1.664,-7.75 0.394,-7.75 1.27,-8.627 J2.3@1.27,-8.7 ; v1(1,-3.3) 1.836,-2.464 2.308,-2.464 2.651,-2.121 3.812,-2.121 3.862,-2.171 v1(5.125,-2.171) ; v1@2.427,8.731 3.326,7.832 3.403,7.832 3.462,7.827 3.487,7.802 3.538,7.781 3.587,7.748 3.632,7.718 3.677,7.718 3.709,7.686 3.796,7.669 ccw(c4.151,8.021) 3.798,7.667 3.897,7.568 4.108,7.357 4.108,7.119 v1(4.127,7.1)
  other v2: -10.825,-0.35
JD_STATUS: R2.1 R3.1 U2.2 | length 21.4
  Top Layer w0.15: R2.1 -6.269,5.894 -6.269,5.362 -5.278,4.371 -3.225,4.371 -2.234,3.38 -1.675,2.82 -0.27,2.82 -0.125,2.675 -0.125,-0.968 -0.341,-1.184 -2.615,-1.184 -2.86,-1.43 ; U2.2 -4.119,0.673 -4.119,-0.171 -2.86,-1.43 ; v1(-3.056,-2.222) -3.045,-2.21 -3.045,-1.687 -2.97,-1.612 -2.97,-1.539 -2.86,-1.43 ; v1(-2.774,-3.947) -2.725,-3.947 -2.56,-3.781 -2.206,-3.781 R3.1
  Bottom Layer w0.15: v1(-3.056,-2.222) -3.011,-2.222 -2.609,-2.623 -2.609,-3.66 -2.774,-3.825 v1(-2.774,-3.947)
MISO: J4.6 U2.13 | length 22.3
  Top Layer w0.15: v1(-8.1,-1.896) -8.075,-1.921 U2.13
  Bottom Layer w0.15: v1(-8.1,-1.896) -7.091,-1.896 -6.987,-2 -6.1,-2 -5.325,-1.225 -4.684,-1.225 -4.487,-1.422 -3.918,-1.422 -3.534,-1.038 -0.378,-1.038 -0.216,-1.2 -0.158,-1.2 cw(c-0.158,-1.35) -0.155,-1.2 4.419,-1.31 4.434,-1.325 5.366,-1.325 7.439,-1.259 ccw(c7.4,-0.035) 7.44,-1.259 8.759,-1.216 J4.6
NetC1_2: C1.2 FB1.2 | length 1.5
  Top Layer w0.3: C1.2 1.665,3.535 3.065,3.535 FB1.2
NetD6_2: D6.2 R2.2 | length 4.8
  Top Layer w0.15: R2.2 -4.8,6.425 -3.443,6.425 -2.943,5.925 -1.35,5.925 -1.325,5.95 -1.3,5.95 D6.2
NetD7_2: D7.2 R3.2 | length 2
  Top Layer w0.15: R3.2 -1.875,-5.025 -1.075,-5.824 -1.075,-6.225 D7.2
NetD8_2: D8.2 R6.1 | length 1.6
  Top Layer w0.15: D8.2 -0.575,0.725 -0.575,1.826 R6.1
NetD8_3: D8.3 R5.1 | length 2.1
  Top Layer w0.15: D8.3@0.775,0.5 1.275,1 1.5,1 1.769,0.731 2.457,0.731 R5.1
NetD8_4: D8.4 R4.1 | length 3.5
  Top Layer w0.15: R4.1 -0.607,-1.875 0.175,-1.092 0.175,-1.05 0.675,-0.55 D8.4
nRESET: J3.6 J10.5 U2.6 | length 9.2
  Top Layer w0.15: v1(-9.3,2.295) -9.214,2.381 -8.814,2.381 -8.675,2.52 -8.023,2.52 -7,1.497 -7,1.429 -6.775,1.204 U2.6
  Bottom Layer w0.15: J10.5 -10.97,2.972 -10.298,2.3 v1@-9.425,2.3 ; J3.6@-10.05,1.675 v1@-9.425,2.3 ; v1(-9.3,2.295) -9.305,2.3 v1@-9.425,2.3
  other v2: -10.45,1.675
PWM: J4.9 U2.11 | length 18.1
  Top Layer w0.15: U2.11 -9.375,-4.546 -9.15,-4.321 -9.15,-4.253 -8.8,-3.903 v1(-8.8,-3.896)
  Bottom Layer w0.15: v1(-8.8,-3.896) -7.581,-5.115 J4.9
RGB_B: R4.2 U2.1 | length 2.4
  Top Layer w0.15: U2.1 -3.525,-0.171 -3.201,-0.495 -2.369,-0.495 R4.2
RGB_G: R5.2 U2.14 | length 15.3
  Top Layer w0.15: U2.14 -7.3,-5.146 -7.3,-5.84 -5.99,-7.15 -4.461,-7.15 -3.1,-5.789 -3.1,-5.119 -2.4,-4.419 -1.738,-4.419 -1.269,-3.95 -1.269,-3.05 -1.033,-2.814 -0.274,-2.814 -0.119,-2.66 1.44,-2.66 2.169,-1.931 2.169,-1.081 2.475,-0.775 R5.2
RGB_R: R6.2 U2.15 | length 18.6
  Top Layer w0.15: v1(-6.8,-3.475) -6.787,-3.488 -6.787,-5.008 U2.15 ; v1(-3.134,-3.289) -3.013,-3.289 -2.77,-3.047 -2.715,-3.047 -2.527,-2.859 -1.628,-2.859 -1.284,-2.514 -0.398,-2.514 -0.132,-2.248 1.427,-2.248 1.869,-1.807 1.869,-0.301 2,-0.169 3.256,-0.169 3.538,0.114 3.538,1.286 3.144,1.681 1.106,1.681 0.8,1.987 R6.2
  Bottom Layer w0.15: v1(-6.8,-3.475) -6.712,-3.475 -6.385,-3.148 -3.397,-3.148 -3.256,-3.289 v1(-3.134,-3.289)
RST: U2.7
RX/CS: J4.7 U2.10 | length 18.9
  Top Layer w0.15: U2.10 -9.375,0.254 -9.15,0.029 -9.15,-0.039 -9.018,-0.171 -8.792,-0.171 -8.192,-0.771 -7.535,-0.771 -7.206,-1.1 -5.838,-1.1 -5.469,-1.469 -5.304,-1.469 -5.023,-1.75 v1(-4.901,-1.75)
  Bottom Layer w0.15: v1(-4.901,-1.75) -4.815,-1.836 -4.389,-1.836 -4.301,-1.924 -3.996,-1.924 -3.41,-1.338 -0.503,-1.338 -0.379,-1.462 ; -0.379,-1.462 -0.335,-1.505 -0.279,-1.505 cw(c-0.279,-1.655) -0.275,-1.505 4.31,-1.625 5.49,-1.625 ; 5.491,-1.625 6.31,-1.61 6.435,-1.61 J4.7
SCK: J4.3 U2.8 | length 18.4
  Top Layer w0.15: U2.8 -8.075,0.254 -7.85,0.029 -7.85,-0.039 -7.718,-0.171 -7.24,-0.171 -6.91,-0.5 -5.131,-0.5 -5.018,-0.614 -4.973,-0.614 -4.837,-0.477 v1(-4.758,-0.477)
  Bottom Layer w0.15: v1(-4.758,-0.477) -4.636,-0.477 -4.455,-0.297 -4.35,-0.297 cw(c-4.35,-0.447) -4.31,-0.302 -4.158,-0.345 -3.84,-0.433 ; -3.839,-0.433 ccw(c-3.8,-0.289) -3.783,-0.438 -0.13,-0.438 -0.054,-0.513 ccw(c0.051,-0.407) 0.019,-0.553 0.022,-0.554 ccw(c0.054,-0.407) 0.05,-0.557 4.618,-0.66 4.683,-0.725 5.117,-0.725 5.425,-0.417 6.803,2.208 7.1,2.505 J4.3
SCL: J4.8 U2.16 | length 24.9
  Top Layer w0.15: U2.16 -6.2,-5.096 -6.2,-6.104 -6.117,-6.187 -5.615,-6.534 v1(-5.615,-6.625) ; v1(6.842,-8.687) 9.189,-6.34 10.21,-6.34 10.25,-6.3 10.487,-6.3 11.165,-5.622 11.165,-4.608 10.294,-3.737 10.294,-2.929 J4.8
  Bottom Layer w0.15: v1(-5.615,-6.625) 2.325,-6.625 3.1,-7.4 6.4,-7.4 6.842,-7.842 v1(6.842,-8.687)
SDA: J4.10 U2.17 | length 18.1
  Top Layer w0.15: U2.17 -5.452,-4.998 -5.452,-3.696 v1(-5.429,-3.673)
  Bottom Layer w0.15: v1(-5.429,-3.673) -5.385,-3.673 -4.243,-4.815 1.134,-4.815 2.059,-3.89 7.907,-3.89 8.778,-4.761 9.586,-4.761 J4.10
SWCLK: J3.4 J10.4 U2.19 | length 13.7
  Top Layer w0.15: v1(-9.382,-0.55) -9.26,-0.55 -9.069,-0.74 -8.94,-0.74 -8.609,-1.071 -7.659,-1.071 -7.33,-1.4 -6.491,-1.4 -4.175,-3.716 U2.19
  Bottom Layer w0.15: J10.4 -8.675,2.925 -8.675,2.025 v1@-8.786,1.914 ; v1(-9.382,-0.55) -9.382,-0.48 -9.718,-0.144 -9.718,-0.007 -10.05,0.325 -9.468,0.907 -9.468,1.232 -8.821,1.879 -8.693,1.879 v1(-8.668,1.854)
  other v2: -10.45,0.325
SWDIO: J3.2 J10.2 U2.18 | length 14
  Top Layer w0.15: v1(-9.157,-1.265) -9.035,-1.265 -8.847,-1.453 -8.741,-1.453 -8.659,-1.535 -8.517,-1.535 -8.353,-1.371 -7.784,-1.371 -6.405,-2.749 -5.566,-2.749 -4.825,-3.49 U2.18
  Bottom Layer w0.15: J3.2@-10.05,-1.025 -9.988,-1.087 -9.655,-1.087 -9.375,-1.367 v1@-9.259,-1.367 ; v1@-9.208,-1.4 -9.1,-1.4 -8.143,-0.443 -8.143,2.072 -8.375,2.304 -8.375,3.895 J10.2 ; v1@-9.157,-1.4 v1(-9.157,-1.265)
  other v2: -10.45,-1.025
TX/MOSI: J4.5 U2.9 | length 17.8
  Top Layer w0.15: U2.9 -8.725,0.254 -8.5,0.029 -8.5,-0.039 -8.068,-0.471 -7.411,-0.471 -7.082,-0.8 -5.713,-0.8 -5.457,-1.056 -4.551,-1.056 -4.478,-0.983 -4.222,-0.983 v1(-4.136,-0.897)
  Bottom Layer w0.15: v1(-4.136,-0.897) -4.05,-0.811 -3.731,-0.811 -3.659,-0.738 -0.254,-0.738 -0.11,-0.882 -0.052,-0.882 cw(c-0.052,-1.032) -0.049,-0.882 4.493,-0.96 4.558,-1.025 5.242,-1.025 6.519,-0.916 J4.5
pads on no net: J1. J2. J3.7 J5.7 R1.1 U1.4

## Polygon pours and split planes (outlines as drawn)
GND on Bottom Layer "GND_L02_P000" (solid, pour order 0): 12.5,12.5 5.9,12.5 5.9,8.724 5.851,8.675 5.826,8.7 -6.1,8.7 -6.1,12.4 -6,12.5 -6.1,12.6 -12.5,12.6 -12.5,-12.5 -12.4,-12.6 -6,-12.6 -6,-8.7 -5.8,-8.5 5.9,-8.5 5.9,-12.5 6,-12.6 12.5,-12.6

## Keep-outs
Keep-Out Layer:
  rectangle: 11.5,-12.4 12.5,12.6
  rectangle: -12.5,-12.5 -11.5,12.5

## Other copper
Top Layer:
  region net GND: -12.2,-7.785 -12.2,-10.1 -10.1,-12.2 -7.785,-12.2 -7.785,-10.015 -10.015,-7.785
  text "Top Layer" at 16.601,6.85 h1.7
Bottom Layer:
  text "Bottom Layer" at 16.6,5.35 h1.7

## Silkscreen, mask and mechanical layers (free items; w line width, h text height)
Top Overlay:
  text "Top Overlay" at 16.601,1.125 h1.7
Bottom Overlay:
  drawing of 194 lines, arcs and shapes, not listed
  text "+" at -7.957,8.592 h2.5 r225
  text "GND" at 1.824,4.572 h0.9
  text "3V3" at 5.202,4.572 h0.9
  text "SCK" at 1.824,2.032 h0.9
  text "AN" at 4.495,2.032 h0.9
  text "Bottom Overlay" at 16.6,-0.375 h1.7
  text "TX/MOSI" at 1.824,-0.508 h0.9
  text "MISO" at 5.518,-0.508 h0.9
  text "RX/CS" at 1.824,-3.048 h0.9
  text "SCL" at 5.111,-3.048 h0.9
  text "PWM" at 1.824,-5.588 h0.9
  text "SDA" at 5.188,-5.588 h0.9
  text "'.ProjectCodenameID'-'.ProjectRevision'" at -4.011,-5.806 h1
  text "'.ProjectCodename'" at 6.1,-7.9 h0.9
  text "-" at -8.605,-8.104 h3.2 r315
  text "-" at 8.104,-8.605 h3.2 r45
Top Paste:
  text "Top Paste" at 16.601,-1.782 h1.7
Bottom Paste:
  text "Bottom Paste" at 16.6,-3.26 h1.7
Top Solder:
  text "Top Solder (resist)" at 16.601,-4.582 h1.7
Bottom Solder:
  text "Bottom Solder (resist)" at 16.6,-6.073 h1.7
Fabrication notes:
  lines w0.1: -13.6,8.672 40.3,8.679 ; -13.425,-7.987 40.475,-7.993 ; -2.5,-11.7 -1.9,-12.3 3.495,-12.3 ; -2.475,11.679 -1.875,12.279 3.52,12.279 ; 2.77,-11.575 3.495,-12.3 ; 2.795,11.554 3.52,12.279 ; 23.295,-12.3 8.125,-12.3 3.495,-12.3 ; 23.32,12.279 8.15,12.279 3.52,12.279 ; 24.975,11.314 25.325,11.665 ; 25.15,-10.629 25.5,-10.979 ; 25.325,8.686 25.325,11.665 ; 25.5,-8 25.5,-10.979 ; 25.675,11.314 25.325,11.665 ; 25.85,-10.629 25.5,-10.979
  text "non-plated slots x2" at 12.926,12.843 h1.7
  text "no board edge pips/ / rat's teeth/mouse bites  / above this line - make  / sure board edge is clean" at 26.325,9.251 h1.7
  text "Fabrication Notes" at 26.025,6.615 h1.7
  text "non-plated slots x2" at 12.976,-13.482 h1.7
  text "no board edge pips/ / rat's teeth/mouse bites  / below this line - make  / sure board edge is clean" at 26.5,-14 h1.7
Top Courtyard:
  drawing of 196 lines, arcs and shapes, not listed
Top Assembly:
  text "Board Cutout" at 26,3.915 h1.7
Board Outline:
  lines w0.2: -12.5,-10.008 -12.5,-4.74 cw(c-11.5,-4.74) -12,-3.874 ccw(c-12.5,-3.008) -11.5,-3.008 -11.5,2.992 ccw(c-12.5,2.992) -12,3.858 cw(c-11.5,4.723) -12.5,4.723 -12.5,9.992 ; -12.5,-10 ccw(c-10,-10) -10,-12.5 ; -12.5,10 cw(c-10,10) -10,12.5 -6.97,12.5 cw(c-6.97,11.5) -5.97,11.5 -5.97,9.148 ccw(c-4.97,9.148) -4.97,8.148 ; -9.996,-12.5 -6.966,-12.5 ccw(c-6.966,-11.5) -5.966,-11.5 -5.966,-9.148 cw(c-4.966,-9.148) -4.966,-8.148 ; -4.97,8.15 -4.24,8.15 ; -4.966,-8.15 -4.266,-8.15 cw(c-4.266,-9.15) -3.266,-9.15 -3.266,-13.2 ccw(c-2.466,-13.2) -2.466,-14 2.474,-14 ccw(c2.474,-13.2) 3.274,-13.2 ; -4.27,8.15 ccw(c-4.27,9.15) -3.27,9.15 ; -3.27,9.148 -3.27,13.198 ; -3.27,13.2 cw(c-2.47,13.2) -2.47,14 2.47,14 cw(c2.47,13.2) 3.27,13.2 3.27,9.15 ccw(c4.27,9.15) 4.27,8.15 4.97,8.15 ; 3.274,-13.198 3.274,-9.148 ; 3.274,-9.15 cw(c4.274,-9.15) 4.274,-8.15 ; 4.244,-8.15 4.974,-8.15 ; 4.97,8.148 ccw(c4.97,9.148) 5.97,9.148 5.97,11.5 cw(c6.97,11.5) 6.97,12.5 10,12.5 cw(c10,10) 12.5,10 12.5,4.732 cw(c11.5,4.732) 12,3.866 ccw(c12.5,3) 11.5,3 11.5,-3 ccw(c12.5,-3) 12,-3.866 cw(c11.5,-4.732) 12.5,-4.732 12.5,-10 cw(c10,-10) 10,-12.5 ; 4.974,-8.148 cw(c4.974,-9.148) 5.974,-9.148 5.974,-11.5 ccw(c6.974,-11.5) 6.974,-12.5 10.004,-12.5
  text "Board Outline" at 26,5.315 h1.7
Top Assy:
  text "Top Assy" at 16.601,4.025 h1.7
Bottom Assy:
  text "Bottom Assy" at 16.6,2.625 h1.7

## Text inside footprints (layer, text, board x,y; h text height)
J1: Mechanical 9 "Jacdac / cable connector  / body" at -4.821,18.158 h1.7
J2: Mechanical 9 "Jacdac / cable connector  / body" at 4.821,-18.158 h1.7 r180